# Altium PCB loraplate.PcbDoc
Units mm, origin at the board's own origin, x right, y up, seen from the top; angles counter-clockwise.
Board outline 79 x 36 mm, 2 copper layers (Top Layer, Bottom Layer); 43 components, 41 nets, 162 pads, 95 vias.
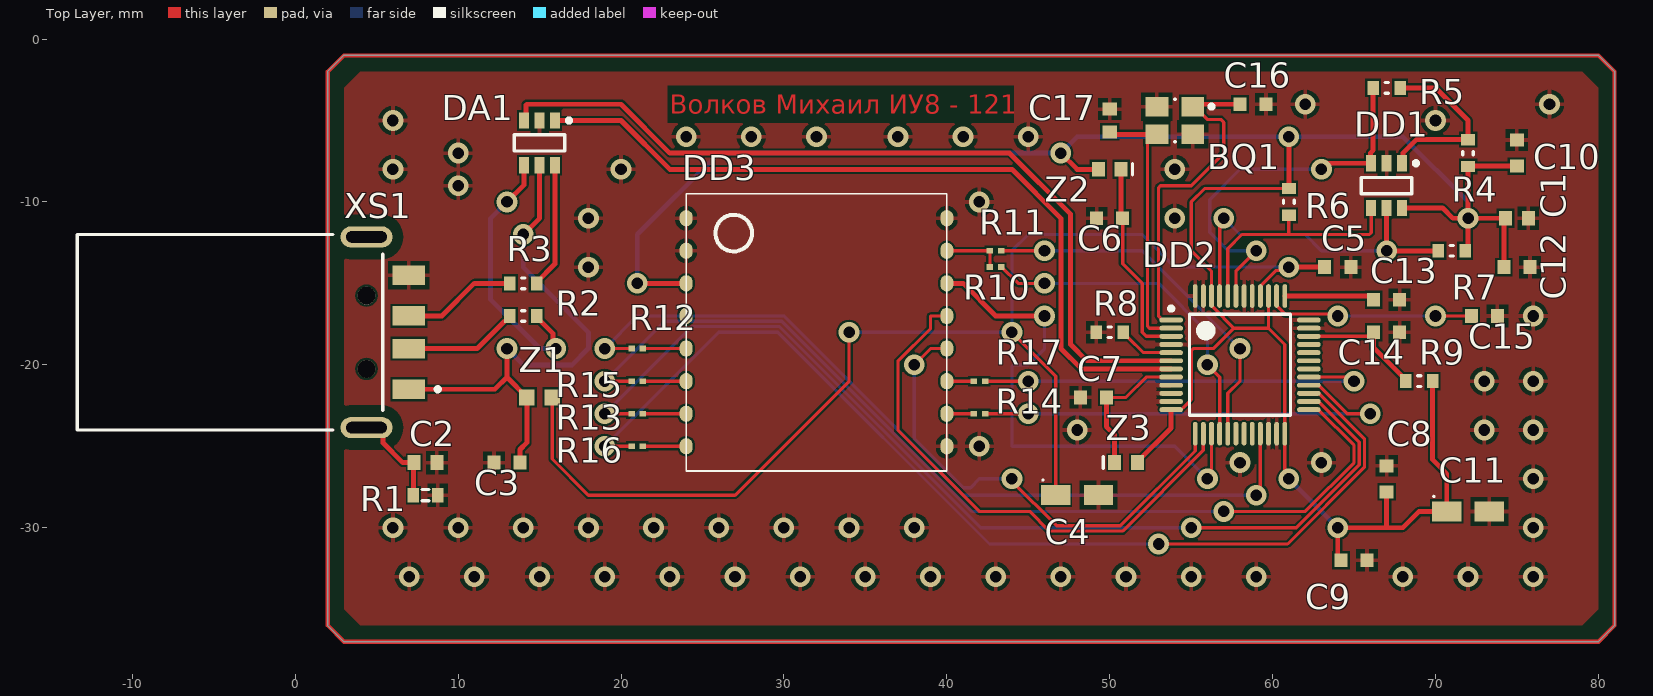
[diagram p0: Top Layer view]
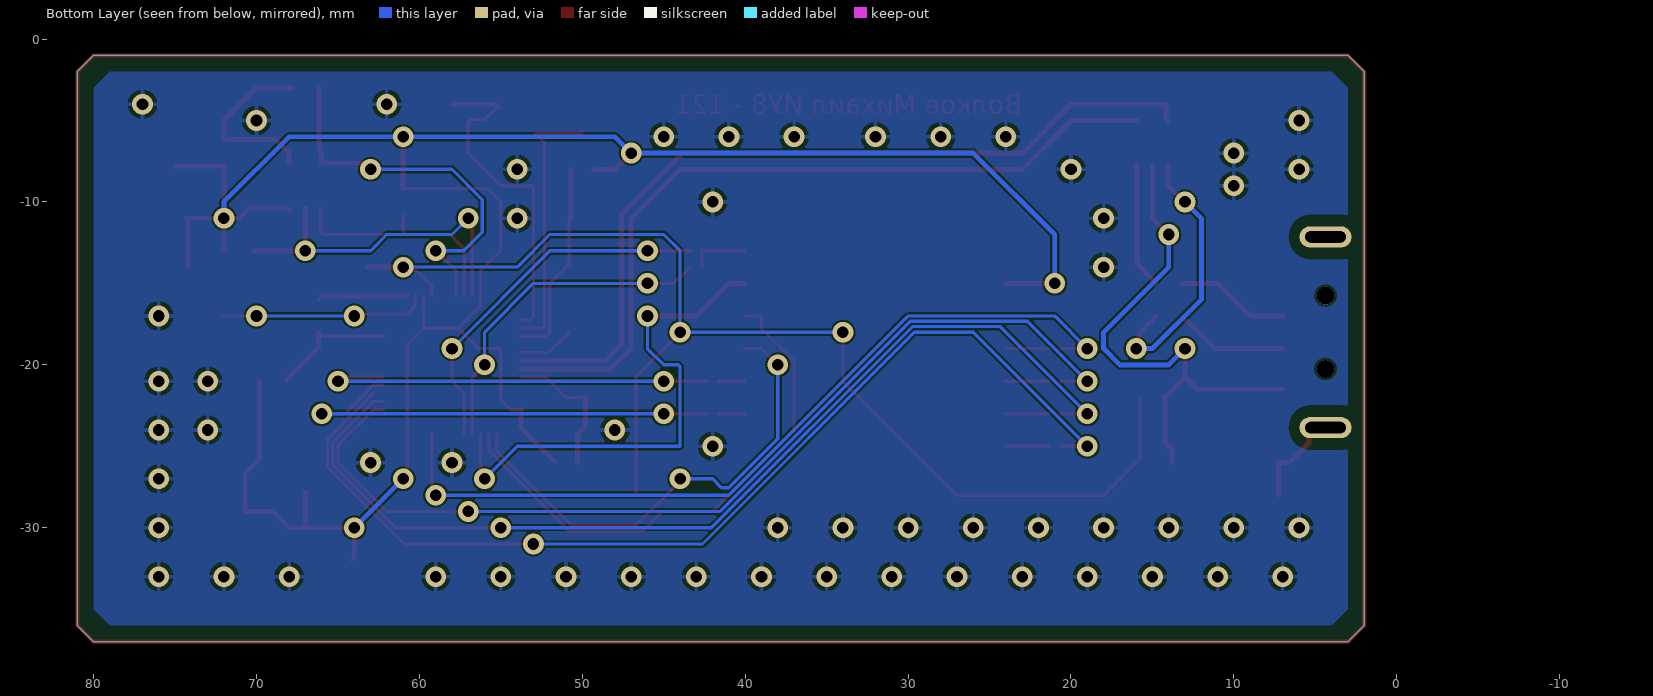
[diagram p1: Bottom Layer view, seen from below]
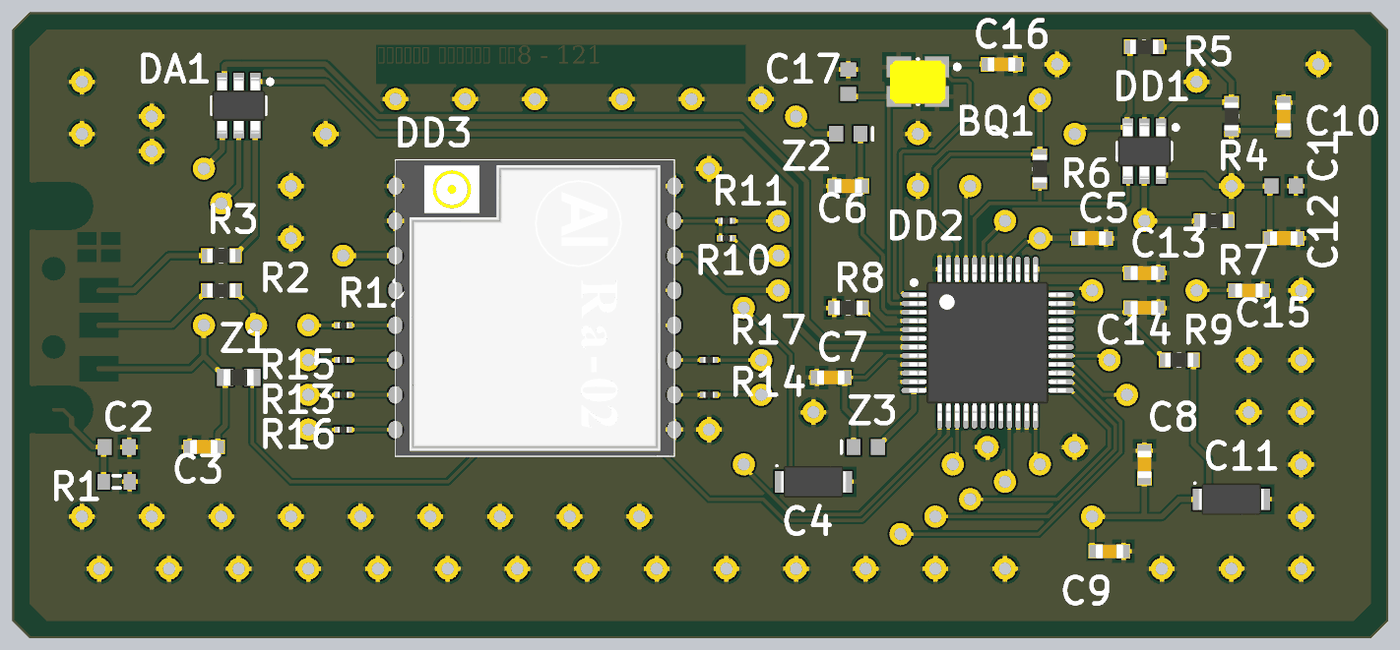
[diagram p2: 3D render of the assembled board from above, using the file's embedded part models]

## Layer stack, top to bottom
Top Solder: solder mask 0.0102, Solder Resist, Dk 3.5
Top Layer: signal copper 0.0356
Dielectric 1: dielectric 0.32, FR-4, Dk 4.8
Bottom Layer: signal copper 0.0356
Bottom Solder: solder mask 0.0102, Solder Resist, Dk 3.5

## Board outline
2,-36 2,-2 3,-1 80,-1 81,-2 81,-36 80,-37 3,-37

## Design rules (kind name [scope] priority, off if disabled: settings)
Clearance [All] p1: gap=0.125 ignorepadtopadclearanceinfootprint=FALSE
DiffPairsRouting [All] p1: maxlimit=0.3 minlimit=0.125 mostfreqgap=0.3 toplayer_minwidth=0.125 toplayer_maxwidth=0.3 toplayer_prefwidth=0.3 bottomlayer_minwidth=0.125 bottomlayer_maxwidth=0.3 bottomlayer_prefwidth=0.3 maxuncoupledlength=12.7
PolygonConnect [All] p1: connectstyle=Relief reliefconductorwidth=0.254 reliefentries=4 polygonreliefangle="90 Angle" airgapwidth=0.254
RoutingCorners [All] p1: cornerstyle=45-Degree minsetback=2.5 maxsetback=2.5
RoutingVias [All] p1: holewidth=0.3 width=0.6 viastyle="Through Hole" minholewidth=0.3 minwidth=0.6 maxholewidth=0.3 maxwidth=0.6
SolderMaskExpansion [All] p1: expansion=0.102
Width [All] p1: maxlimit=0.3 minlimit=0.125 preferedwidth=0.2
28 further rules are at their usual default settings.

## Classes and differential pairs
differential pair USB: +USB_P -USB_N
differential pair USB1: +USB1_P -USB1_N

## Components (designator, comment, footprint, x,y, rotation, side; value= is the part's Value field where it differs from the comment)
BQ1 "ABM8G-12.000MHZ-4Y-T3" Abracon_ABM8G_0 54,-5 r180 top
C1 "*" 1608[0603] 75,-11 r180 top value=100n
C2 "*" 1608[0603] 8,-26 r180 top value=4.7n
C3 "*" CAPC1608X09L 13,-26 r0 top value=10n
C4 "*" CAPMP3216X16N-A 48,-28 r0 top value=4.7uF
C5 "*" CAPC1608X09L 64,-14 r180 top value=100n
C6 "*" CAPC1608X09L 50,-11 r0 top value=100n
C7 "*" CAPC1608X09L 49,-22 r0 top value=100n
C8 "*" CAPC1608X09L 67,-27 r270 top value=100n
C9 "*" CAPC1608X09L 65,-32 r180 top value=100n
C10 "*" CAPC1608X09L 75,-7 r270 top value=100n
C11 "*" CAPMP3216X16N-A 72,-29 r0 top value=4.7uF
C12 "*" CAPC1608X09L 75,-14 r180 top value=100n
C13 "*" CAPC1608X09L 67,-16 r180 top value=100n
C14 "*" CAPC1608X09L 67,-18 r0 top value=10n
C15 "*" CAPC1608X09L 73,-17 r180 top value=100n
C16 "*" CAPC1608X09L 58.8,-4 r180 top value=10
C17 "*" 1608[0603] 50,-5 r270 top value=10
DA1 "USBLC6-2SC6" SOT95P280X145-6N 15,-6.375 r270 top
DD1 "93LC56BT-I/OT" SOT95P280X145-6N 67,-9 r270 top
DD2 "FT232HL-REEL" TSQFP50P900X900X160-48N 58,-20 r0 top
DD3 "RA-02 SX1278" RA-02 24,-9.5 r0 top
R1 "R1608" J1-0603 8,-28 r0 top value=1M
R2 "R1608" RESC1608X05N 14,-17 r180 top value=22
R3 "R1608" RESC1608X05N 14,-15 r180 top value=22
R4 "R1608" RESC1608X05N 72,-7 r270 top value=10k
R5 "R1608" RESC1608X05N 67,-3 r0 top value=2k
R6 "R1608" RESC1608X05N 61,-10 r90 top value=10k
R7 "R1608" RESC1608X05N 71,-13 r0 top value=10k
R8 "R1608" RESC1608X05N 50,-18 r180 top
R9 "R1608" RESC1608X05N 69,-21 r180 top value=10k
R10 "R0603" RESC0603X02N 43,-14 r180 top value=0
R11 "R0603" RESC0603X02N 43,-13 r180 top value=0
R12 "R0603" RESC0603X02N 21,-19 r0 top value=0
R13 "R0603" RESC0603X02N 21,-23 r0 top value=0
R14 "R0603" RESC0603X02N 42,-23 r180 top value=0
R15 "R0603" RESC0603X02N 21,-21 r0 top value=0
R16 "R0603" RESC0603X02N 21,-25 r0 top value=0
R17 "R0603" RESC0603X02N 42,-21 r180 top value=0
XS1 "Conn_Molex_0480372200_eec" Molex_0480372200_0 -4,-18 r270 top
Z1 "BLM18AG601SN1D" INDC1608X08N_BLM18AG 15,-22 r0 top
Z2 "BLM18AG601SN1D" INDC1608L 50,-8 r180 top
Z3 "BLM18AG601SN1D" INDC1608L 51,-26 r0 top

## Footprints (in the part's own frame and the unit in brackets; to place one, negate y for a bottom-side part, rotate by r counter-clockwise, add the part's x,y. Pads: shape width x height; smd on the part's side, far side on the other; paste and mask are expansions set on the pad)
1608[0603] [mm] "Chip Capacitor, Body 1.6x0.8mm, IPC High Density"
  rect 0.8x0.9 smd: 1(-0.7,0) 2(0.7,0)
  body extent -0.87,-0.48 0.87,0.48, height 1.3
Abracon_ABM8G_0 [mm]
  rect 1.4x1.2 smd paste+0 mask+0: 1(-1.1,-0.85) 2(1.1,-0.85) 3(1.1,0.85) 4(-1.1,0.85)
  silkscreen extent -2.38,-1.3 0.02,1.3, body extent -1.9,-1.55 1.9,1.55, height 0.25
CAPC1608X09L [mm] "Chip Capacitor, 2-Leads, Body 1.60x0.80mm, IPC High Density"
  rect 0.8x0.85 smd paste-0.05 mask+0.07: 1(-0.8,0) 2(0.8,0)
  body extent -0.8,-0.4 0.8,0.4, height 0.9
CAPMP3216X16N-A [mm] "Molded Capacitor, 2-Leads, Body 3.20x1.60mm, IPC Medium Density"
  rect 1.8x1.23 smd: 1(-1.31,0) 2(1.31,0)
  silkscreen extent -2.15,0.88 -2.05,0.97, body extent -1.92,-0.9 1.92,0.9, height 1.6
INDC1608L [mm] "Chip Inductor, Body 1.6x0.8mm, IPC High Density"
  rect 0.8x0.9 smd: 1(-0.7,0) 2(0.7,0)
  silkscreen extent -1.4,-0.35 -1.4,0.35, body extent -0.87,-0.48 0.87,0.48, height 0.55
INDC1608X08N_BLM18AG [mm] "Chip Inductor, 2-Leads, Body 1,60x0,80mm, IPC Medium Density"
  rect 0.94x0.98 smd: 1(-0.78,0) 2(0.78,0)
  body extent -0.87,-0.48 0.87,0.48, height 0.8
J1-0603 [mm] "Chip Resistor, Body 1.6x0.8mm, IPC High Density"
  rect 0.7x0.9 smd: 1(-0.75,0) 2(0.75,0)
  silkscreen extent -0.2,-0.35 0.2,0.35, body extent -0.85,-0.48 0.85,0.48, height 0.9
Molex_0480372200_0 [mm]
  rect 1.2x2 smd paste+0 mask+0: 1(3.5,10.975) 2(1,10.975) 3(-1,10.975) 4(-3.5,10.975)
  oval 1.3x3.2 hole 2.5 slot 0.7 at 0 deg paste-1000 mask+0: 5(-5.85,8.375) 6(5.85,8.375)
  round 1.1 hole 1.1 unplated paste-1000 mask+0: ""(-2.25,8.375) ""(2.25,8.375)
  silkscreen extent -6,-9.38 6,12.88, body extent -6.6,-9.6 6.6,12.07, height 0.25
RA-02 [mm]
  oval 0.8x1 smd: 1(0,-1.5) 2(0,-3.5) 3(0,-5.5) 4(0,-7.493) 5(0,-9.5) 6(0,-11.5) 7(0,-13.5) 8(0,-15.5) 9(16,-15.5) 10(16,-13.5) 11(16,-11.5) 12(16,-9.5) 13(16,-7.5) 14(16,-5.5) 15(16,-3.5) 16(16,-1.5)
  silkscreen extent 0,-17.02 16,0, body extent 0,-17.01 16,-0.01, height 3.2
RESC0603X02N [mm] "Chip Resistor, 2-Leads, Body 0.60x0.30mm, IPC Medium Density"
  rect 0.4x0.35 smd paste-1: 1(-0.35,0) 2(0.35,0)
  body extent -0.32,-0.17 0.32,0.17, height 0.23
RESC1608X05N [mm] "Chip Resistor, 2-Leads, Body 1.60x0.80mm, IPC Medium Density"
  rect 0.7x0.85 smd paste-0.05: 1(-0.825,0) 2(0.825,0)
  silkscreen extent -0.1,-0.33 0.1,0.33, body extent -0.8,-0.4 0.8,0.4, height 0.45
SOT95P280X145-6N [mm] "SOT23, 6-Leads, Body 2.92x2.80mm, Pitch 0.95mm, IPC Medium Density"
  rect 1x0.6 smd: 1(-1.375,0.95) 2(-1.375,0) 3(-1.375,-0.95) 4(1.375,-0.95) 5(1.375,0) 6(1.375,0.95)
  silkscreen extent -1.5,-1.55 0.5,1.93, body extent -1.6,-1.53 1.6,1.53, height 1.45
TSQFP50P900X900X160-48N [mm] "TSQFP, 48-Leads, Body 7,00x7,00mm, Pitch 0,50mm, IPC Medium Density"
  oval 1.45x0.3 smd mask+0.07: 1(-4.225,2.75) 2(-4.225,2.25) 3(-4.225,1.75) 4(-4.225,1.25) 5(-4.225,0.75) 6(-4.225,0.25) 7(-4.225,-0.25) 8(-4.225,-0.75) 9(-4.225,-1.25) 10(-4.225,-1.75) 11(-4.225,-2.25) 12(-4.225,-2.75) 25(4.225,-2.75) 26(4.225,-2.25) 27(4.225,-1.75) 28(4.225,-1.25) 29(4.225,-0.75) 30(4.225,-0.25) 31(4.225,0.25) 32(4.225,0.75) 33(4.225,1.25) 34(4.225,1.75) 35(4.225,2.25) 36(4.225,2.75)
  oval 0.3x1.45 smd mask+0.07: 13(-2.75,-4.225) 14(-2.25,-4.225) 15(-1.75,-4.225) 16(-1.25,-4.225) 17(-0.75,-4.225) 18(-0.25,-4.225) 19(0.25,-4.225) 20(0.75,-4.225) 21(1.25,-4.225) 22(1.75,-4.225) 23(2.25,-4.225) 24(2.75,-4.225) 37(2.75,4.225) 38(2.25,4.225) 39(1.75,4.225) 40(1.25,4.225) 41(0.75,4.225) 42(0.25,4.225) 43(-0.25,4.225) 44(-0.75,4.225) 45(-1.25,4.225) 46(-1.75,4.225) 47(-2.25,4.225) 48(-2.75,4.225)
  silkscreen extent -4.35,-3.1 3.1,3.57, body extent -4.5,-4.5 4.5,4.5, height 1.6

## Part data
C1 C2 C3 C5 C6 C7 C8 C9 C10 C12 C13 C14 C15 C16 C17: library part CC1608, "Конденсатор 1.6x0.8 мм", Tolerance=±10%, ТКЕ=X7R
  C1 C5 C6 C7 C8 C9 C10 C12 C13 C15: РКД Наименование="CC1608M - NP0 - 16 V - 100 nF ±10%"
  C2: РКД Наименование="CC1608M - NP0 - 16 V - 4.7 nF ±10%"
  C3 C14: РКД Наименование="CC1608M - NP0 - 16 V - 10 nF ±10%"
  C16 C17: РКД Наименование="CC1608M - NP0 - 16 V - 10 pF ±10%"
C4 C11: library part CT3216-A, "Tantalum Surface Mount Capacitor, Size A", Voltage=16, РКД Наименование="CT3216M - xx V - 4.7 uF ±10%"
DA1: "USB protection IC", Breakdown Voltage=6V, Capacitance=3.5pF, Case/Package=SOT-23, Clamping Voltage=17V, Leakage Current=150nA, Manufacturer=STMicroelectronics, Max Operating Temperature=125°C, Min Operating Temperature=-40°C, Operating Supply Voltage=1.1V, Package Quantity=3000, Peak Pulse Current=5A, Power Line Protection=Yes, Reverse Standoff Voltage=5.25V, Supplier Part Number 1=497-5235-1-ND, Test Current=1mA, Working Voltage=5V, ComponentLink1Description=http://www.farnell.com/datasheets/1690354.pdf, ComponentLink1URL=http://www.farnell.com/datasheets/1690354.pdf, ComponentLink2Description=http://www.st.com/content/ccc/resource/technical/document/datasheet/06/1d/48/9c/6c/20/4a/b2/CD00050750.pdf/files/CD00050750.pdf/jcr:content/translations/en.CD00050750.pdf, ComponentLink2URL=http://www.st.com/content/ccc/resource/technical/document/datasheet/06/1d/48/9c/6c/20/4a/b2/CD00050750.pdf/files/CD00050750.pdf/jcr:content/translations/en.CD00050750.pdf, ComponentLink3Description=http://www.st.com/web/en/resource/technical/document/datasheet/CD00050750.pdf, ComponentLink3URL=http://www.st.com/web/en/resource/technical/document/datasheet/CD00050750.pdf, ComponentLink4Description=http://datasheet.iiic.cc/stmicroelectronics/USBLC6-2SC6.pdf, ComponentLink4URL=http://datasheet.iiic.cc/stmicroelectronics/USBLC6-2SC6.pdf, ComponentLink5Description=http://www.produktinfo.conrad.com/datenblaetter/1100000-1199999/001184109-da-01-en-IC_ESD_PROTECTI_USBLC6_2SC6_SOT_23_6_STM.pdf, ComponentLink5URL=http://www.produktinfo.conrad.com/datenblaetter/1100000-1199999/001184109-da-01-en-IC_ESD_PROTECTI_USBLC6_2SC6_SOT_23_6_STM.pdf, Contact Plating=Matte,Tin, Data Rate=480Mbps, Depth=1.75mm, Direction=Bidirectional,Unidirectional, Element Configuration=Dual, ESD Protection=Yes, Height=1.3mm, Lead Free="Lead Free", Length=3.05mm, Manufacturer Part Number=USBLC6-2SC6, Max Breakdown Voltage=6V, Max Reverse Leakage Current=150nA, Min Breakdown Voltage=6V, Mount="Surface Mount", Number of Bidirectional Channels=2, Number of Channels=2, Number of Elements=1, Number of Pins=6, Packaging="Tape and Reel", PartNo=USBLC6-2SC6, Polarity=Bidirectional,Unidirectional, Pricing 1="1=0.49, 10=0.419, 100=0.3131, 500=0.24602, 1000=0.1901 (USD)", Radiation Hardening=No, REACH SVHC="No SVHC", Reverse Breakdown Voltage=6V, Stock 1=165611, Supplier 1=Digi-Key, Termination=SMD/SMT, Width=1.75mm
DD1: "IC EEPROM 2K SPI 2MHZ SOT23-6", Case/Package=SOT-23, Frequency=2MHz, Manufacturer=Microchip, Max Operating Temperature=85°C, Max Supply Voltage=5.5V, Min Operating Temperature=-40°C, Min Supply Voltage=2.5V, Nominal Supply Current=2mA, Package Quantity=3000, Supplier Part Number 1=93LC56BT-I/OTCT-ND, Access Time=250ns, ComponentLink1Description=http://ww1.microchip.com/downloads/jp/DeviceDoc/jp013939.pdf, ComponentLink1URL=http://ww1.microchip.com/downloads/jp/DeviceDoc/jp013939.pdf, ComponentLink2Description=http://www.microchip.com/mymicrochip/filehandler.aspx?ddocname=en013939, ComponentLink2URL=http://www.microchip.com/mymicrochip/filehandler.aspx?ddocname=en013939, Contact Plating=Matte,Tin, Density=2Kb, Height=1.3mm, Interface=Serial, Lead Free="Lead Free", Length=3.1mm, Manufacturer Part Number=93LC56BT-I/OT, Max Frequency=2MHz, Memory Size=2Kb, Memory Type=EEPROM, Mount="Surface Mount", Number of Pins=6, Packaging="Tape and Reel", Pricing 1="1=0.23, 25=0.2164, 100=0.2119 (USD)", Radiation Hardening=No, REACH SVHC="No SVHC", Stock 1=30936, Supplier 1=Digi-Key, Width=1.8mm
DD2: "IC HS USB TO UART/FIFO 48LQFP", Case/Package=LQFP, Manufacturer=FTDI, Max Operating Temperature=85°C, Max Supply Voltage=3.63V, Min Operating Temperature=-40°C, Min Supply Voltage=2.97V, Nominal Supply Current=60mA, Operating Supply Current=24mA, Operating Supply Voltage=3.3V, Package Quantity=1, Supplier Part Number 1=768-1101-1-ND, ComponentLink1Description=http://www.ftdichip.com/Support/Documents/DataSheets/ICs/DS_FT232H.pdf, ComponentLink1URL=http://www.ftdichip.com/Support/Documents/DataSheets/ICs/DS_FT232H.pdf, ComponentLink2Description=http://www.farnell.com/datasheets/1913746.pdf, ComponentLink2URL=http://www.farnell.com/datasheets/1913746.pdf, ComponentLink3Description=http://www.mouser.com/ds/2/163/DS_FT232H-11324.pdf, ComponentLink3URL=http://www.mouser.com/ds/2/163/DS_FT232H-11324.pdf, Data Rate=12Mbps, Height=1.4mm, Interface=RS-232,RS-422,RS-485,UART, Lead Free="Lead Free", Length=7mm, Manufacturer Part Number=FT232HL-REEL, Mount="Surface Mount", Number of Channels=1, Number of Pins=48, Packaging="Tape and Reel", Pricing 1="1=4.25, 10=3.55, 100=3.1, 250=2.95, 500=2.85002 (USD)", REACH SVHC="No SVHC", Stock 1=26419, Supplier 1=Digi-Key, Weight=0.006409oz, Width=7mm
DD3: library part RA-02
R1: "Резистор 1.6x0.8 мм", Manufacturer Part Number=RC0603JR-071ML, Supplier Part Number 1=311-1.0MGRCT-ND, Tolerance=±5%, РКД Наименование="RC1608M - 1 MOhm ±5%"
R2 R3: "Резистор 1.6x0.8 мм", Tolerance=±1%, РКД Наименование="RC1608M - 22 Ohm ±1%"
R4 R5 R6 R7 R8 R9: "Резистор 1.6x0.8 мм", Tolerance=±5%
  R4 R6 R7 R9: РКД Наименование="RC1608M - 10 kOhm ±5%"
  R5: РКД Наименование="RC1608M - 2 kOhm ±5%"
  R8: РКД Наименование="RC1608M - 100 Ohm ±5%"
R10 R11 R12 R13 R14 R15 R16 R17: "Резистор 0.6x0.3 мм"
XS1: "CONN PLUG USB A 4POS SMD R/A", Current - Maximum per Contact=1.5A, Digikey Part Number=WM3983CT-ND, Manufacturer=Molex, Mouser Part Number=538-48037-2200, Package=CONN_USB_12MM0_18MM75, Part Number=0480372200, Temperature="-20°C to +85°C", Temperature Range High=+85°C, Temperature Range Low=-20°C, Voltage - Maximum="150V AC (RMS)", ComponentLink1Description=Upverter, ComponentLink1URL=https://upverter.com/upn/revision/6bade1e906f93a88/, ComponentLink2Description=Datasheet, ComponentLink2URL=http://www.molex.com/pdm_docs/sd/480372200_sd.pdf, Digikey Description="CONN PLUG USB A 4POS SMD R/A", helpURL=https://upverter.com/upn/revision/6bade1e906f93a88/, Is Female=yes, Lead Free=yes, Price=0.972849437621, RoHS=TRUE, Supplier 1=Digi-Key, Supplier 2=Mouser, Supplier Part Number 1=WM3983CT-ND, Supplier Part Number 2=538-48037-2200
Z1 Z2 Z3: "FERRITE CHIP 600 OHM 500MA 0603", Case/Package=0603, Case Code (Metric)=1608, Current Rating=500mA, DC Resistance (DCR)=380mR, Frequency=100MHz, Manufacturer=Murata, Max Operating Temperature=125°C, Min Operating Temperature=-55°C, Package Quantity=1, Supplier Part Number 1=490-1014-1-ND, Tolerance=25%, Case Code (Imperial)=0603, ComponentLink1Description=https://www.murata.com/en-us/products/productdata/8796738650142/ENFA0003.pdf, ComponentLink1URL=https://www.murata.com/en-us/products/productdata/8796738650142/ENFA0003.pdf, ComponentLink2Description=http://www.farnell.com/datasheets/1756147.pdf, ComponentLink2URL=http://www.farnell.com/datasheets/1756147.pdf, ComponentLink3Description=http://www.jameco.com/Jameco/Products/ProdDS/1844766.pdf, ComponentLink3URL=http://www.jameco.com/Jameco/Products/ProdDS/1844766.pdf, ComponentLink4Description=http://search.murata.co.jp/Ceramy/image/img/PDF/ENG/L0110S0100BLM18A.pdf, ComponentLink4URL=http://search.murata.co.jp/Ceramy/image/img/PDF/ENG/L0110S0100BLM18A.pdf, ComponentLink5Description=http://www.produktinfo.conrad.com/datenblaetter/425000-449999/442309-da-01-en-CHIP_DROSSEL_0603_600R_500MA_1_6X0_8MM.pdf, ComponentLink5URL=http://www.produktinfo.conrad.com/datenblaetter/425000-449999/442309-da-01-en-CHIP_DROSSEL_0603_600R_500MA_1_6X0_8MM.pdf, ComponentLink6Description=http://www.produktinfo.conrad.com/datenblaetter/1100000-1199999/001172228-da-01-en-DROSSEL_0603_600R_1_6X0_8MM_4000ST.pdf, ComponentLink6URL=http://www.produktinfo.conrad.com/datenblaetter/1100000-1199999/001172228-da-01-en-DROSSEL_0603_600R_1_6X0_8MM_4000ST.pdf, Core Material=Ferrite, DC Current=500mA, Depth=0.8mm, Height=0.8mm, Impedance=600R, Lead Free="Lead Free", Length=1.6mm, Manufacturer Part Number=BLM18AG601SN1D, Material=Ferrite,Steel, Max Current Rating=500mA, Max DC Current=500mA, Military Standard=Not, Number of Circuits=1, Number of Lines=1, Number of Pins=2, Packaging="Tape and Reel", Pricing 1="1=0.1, 10=0.079, 25=0.072, 50=0.0648, 100=0.0476, 250=0.0346, 500=0.0317, 1000=0.02738 (USD)", Radiation Hardening=No, REACH SVHC="No SVHC", Shielding=Unshielded, Stock 1=1068043, Supplier 1=Digi-Key, Termination=SMD/SMT, Test Frequency=100MHz, Weight=7.1E-05oz, Width=0.8mm

## Via types
v1: diameter 1.27, hole 0.711, Top Layer to Bottom Layer, 95 vias

## Nets (pads, with @x,y where several pads share a name; then routed paths per layer and width w, separated by ;. In a path a pad name is that pad's centre, name@x,y a point inside that pad or via, vN(x,y) a via of type N, cw(c..) or ccw(c..) an arc to the next point about the centre after c; other vN are vias at no path point)
CS: DD2.16 R10.1 | length 20.8
  Top Layer w0.2: R10.1 43.375,-14 44.375,-15 v1(46,-15) ; v1(56,-20) 56.75,-20.75 DD2.16
  Bottom Layer w0.2: v1(46,-15) 53,-15 56,-18 v1(56,-20)
CS/P: DD2.17 R11.1 | length 22.7
  Top Layer w0.2: R11.1 v1(46,-13) ; DD2.17 57.25,-21.75 58,-21 v1(58,-19)
  Bottom Layer w0.2: v1(46,-13) 52,-13 v1(58,-19)
DI: DD2.15 DD3.14 | length 31.9
  Top Layer w0.2: v1(56,-27) 56,-26.71 56.25,-26.46 DD2.15
  Top Layer w0.3: DD3.14 41,-15 43,-17 v1(46,-17)
  Bottom Layer w0.2: v1(46,-17) 46,-19 45,-20 44.117,-20 44,-20.117 44,-25 54,-25 v1(56,-27)
DO: DD2.14 DD3.13 | length 33.2
  Top Layer w0.2: DD3.13 39,-17 39,-17.784 37,-19.784 37,-24 42,-29 45.094,-29 46.301,-30.208 50.792,-30.208 55.75,-25.25 DD2.14
EECLK: DD1.4 DD2.44 R6.1 | length 14.8
  Top Layer w0.2: DD2.44 57.25,-12.867 58.117,-12 61,-12 ; R6.1 61,-12 ; DD1.4 66.05,-11.883 65.933,-12 61,-12
EECS: DD1.5 DD2.45 R7.1 | length 21.5
  Top Layer w0.2: DD2.45 56.75,-11.54 57,-11.29 v1(57,-11)
  Top Layer w0.3: DD1.5 v1(67,-13) R7.1
  Bottom Layer w0.2: v1(57,-11) 58,-12 62,-12 63,-13 v1(67,-13)
EEDATA: DD1.3 DD2.43 R5.1 | length 24.2
  Top Layer w0.2: DD2.43 57.75,-14.25 v1(59,-13) ; v1(63,-8) v1@63.375,-7.625 ; DD1.3@66,-7.575 DD1.3
  Top Layer w0.3: v1@63.375,-7.625 DD1.3 ; DD1.3@66,-7.575 66,-7 66.175,-6.825 R5.1
  Bottom Layer w0.2: v1(59,-13) 57.283,-13 56.14,-11.857 56.14,-9.86 58,-8 v1(63,-8)
GND: BQ1.2 BQ1.4 C1.1 C2.1 C3.1 C4.2 C5.1 C6.1 C7.1 C8.1 C9.1 C10.1 C11.2 C12.1 C13.1 C14.2 C15.1 C16.1 C17.1 DA1.2 DD1.2 DD2.4 DD2.9 DD2.10 DD2.11 DD2.22 DD2.23 DD2.35 DD2.36 DD2.41 DD2.42 DD2.47 DD2.48 DD3.1 DD3.2 DD3.9 DD3.16 R1.2 R8.2 XS1.4
  other v1: 7,-33 11,-33 15,-33 19,-33 23,-33 27,-33 31,-33 35,-33 39,-33 43,-33 47,-33 51,-33 55,-33 59,-33 68,-33 72,-33 76,-33 6,-30 10,-30 14,-30 18,-30 22,-30 26,-30 30,-30 34,-30 38,-30 76,-30 76,-27 58,-26 63,-26 42,-25 48,-24 73,-24 76,-24 73,-21 76,-21 76,-17 18,-14 18,-11 54,-11 42,-10 10,-9 6,-8 20,-8 54,-8 10,-7 24,-6 28,-6 32,-6 37,-6 41,-6 45,-6 6,-5 70,-5 62,-4 77,-4
NetBQ1_1: BQ1.1 C16.2 DD2.1 | length 20.7
  Top Layer w0.2: DD2.1 53.227,-17.25 53,-17.023 53,-9.117 53.117,-9 55,-9 57,-7 57,-5.117 56.816,-4.933 55.983,-4.933 55.2,-4.15 BQ1.1
  Top Layer w0.3: BQ1.1@55.2,-4.15 55.35,-4 C16.2
NetBQ1_3: BQ1.3 C17.2 DD2.2 | length 16.4
  Top Layer w0.2: C17.2 C17.2@50.15,-5.85 ; BQ1.3@52.825,-5.85 52.325,-6.35 52.325,-17.633 52.442,-17.75 DD2.2
  Top Layer w0.3: C17.2@50.15,-5.85 BQ1.3@52.825,-5.85
NetC2_2: C2.2 R1.1 XS1.6 | length 6.2
  Top Layer w0.2: XS1.6 4.892,-23.85 XS1.6@5.4,-24.358 ; C2.2@7.25,-26.05 C2.2@7.25,-26 ; C2.2@7.25,-25.9 C2.2@7.25,-26 ; C2.2 C2.2@7.25,-26
  Top Layer w0.3: XS1.6@5.4,-24.358 5.4,-24.8 6.6,-26 C2.2@7.25,-26 ; R1.1 C2.2@7.25,-26.05
NetC13_2: C13.2 DD2.37 | length 5.5
  Top Layer w0.2: C13.2@65.975,-15.775 C13.2
  Top Layer w0.3: DD2.37 C13.2@65.975,-15.775
NetC14_1: C14.1 DD2.34 R9.2 | length 7.9
  Top Layer w0.2: DD2.34 65.95,-18.25 C14.1 ; R9.2 R9.2@68.175,-20.925
  Top Layer w0.3: C14.1 66.2,-18.95 R9.2@68.175,-20.925
NetC15_2: C15.2 DD2.38 | length 12.8
  Top Layer w0.2: DD2.38 60.25,-16.377 60.375,-16.502 60.375,-16.505 60.745,-16.875 63.875,-16.875 v1(64,-17) ; v1(70,-17) C15.2
  Bottom Layer w0.2: v1(64,-17) v1(70,-17)
NetDD1_1: DD1.1 R4.1 R5.2 | length 11.2
  Top Layer w0.2: DD1.1 DD1.1@68,-7.575
  Top Layer w0.3: R5.2 70,-3 72,-5 R4.1 68.825,-6.175 68,-7 DD1.1@68,-7.575
NetDD2_5: DD2.5 R8.1 | length 3.5
  Top Layer w0.2: R8.1 50.825,-18.075 51.075,-18.325 51.15,-18.325 52.075,-19.25 DD2.5
NetDD2_21: DD2.21 R12.1 | length 50.9
  Top Layer w0.2: v1(19,-19) R12.1 ; v1(59,-28) 59,-27.71 59.25,-27.46 DD2.21
  Bottom Layer w0.2: v1(19,-19) 21,-17 30,-17 41,-28 v1(59,-28)
NetDD2_25: DD2.25 R15.1 | length 60
  Top Layer w0.2: v1(19,-21) R15.1 ; v1(57,-29) 62,-29 65,-26 65,-24.95 62.8,-22.75 DD2.25
  Bottom Layer w0.2: v1(19,-21) 22.675,-17.325 29.865,-17.325 41.54,-29 v1(57,-29)
NetDD2_26: DD2.26 R13.1 | length 62.4
  Top Layer w0.2: v1(19,-23) R13.1 ; v1(55,-30) 61.46,-30 65.325,-26.135 65.325,-24.745 62.955,-22.375 62.952,-22.375 62.827,-22.25 DD2.26
  Bottom Layer w0.2: v1(19,-23) 24.35,-17.65 29.731,-17.65 42.081,-30 v1(55,-30)
NetDD2_27: DD2.27 R16.1 | length 64.2
  Top Layer w0.2: v1(19,-25) R16.1 ; v1(53,-31) 60.919,-31 65.65,-26.269 65.65,-24.57 62.867,-21.787 62.864,-21.787 DD2.27@62.827,-21.75
  Bottom Layer w0.2: v1(19,-25) 26,-18 29.621,-18 42.621,-31 v1(53,-31)
NetDD2_28: DD2.28 R14.1 | length 28.1
  Top Layer w0.2: R14.1 v1(45,-23) ; DD2.28 62.827,-21.25 62.952,-21.375 62.955,-21.375 64.58,-23 v1(66,-23)
  Bottom Layer w0.2: v1(45,-23) v1(66,-23)
NetDD2_29: DD2.29 R17.1 | length 25.5
  Top Layer w0.2: R17.1 v1(45,-21) ; DD2.29 64.46,-20.75 64.71,-21 v1(65,-21)
  Bottom Layer w0.2: v1(45,-21) v1(65,-21)
NetDD3_5: DD3.5 R12.2 | length 2.6
  Top Layer w0.2: R12.2 DD3.5
NetDD3_6: DD3.6 R15.2 | length 2.7
  Top Layer w0.2: R15.2 DD3.6
NetDD3_7: DD3.7 R13.2 | length 2.7
  Top Layer w0.2: R13.2 DD3.7
NetDD3_8: DD3.8 R16.2 | length 2.7
  Top Layer w0.2: R16.2 DD3.8
NetDD3_10: DD3.10 R14.2 | length 1.7
  Top Layer w0.2: DD3.10 R14.2
NetDD3_11: DD3.11 R17.2 | length 1.7
  Top Layer w0.2: DD3.11 R17.2
NetDD3_15: DD3.15 R10.2 R11.2 | length 3.7
  Top Layer w0.2: DD3.15 R11.2 R10.2
NetR2_2: R2.2 XS1.2 | length 7.1
  Top Layer w0.2: R2.2@12.85,-17.325 12.925,-17.325 13.175,-17.075 R2.2
  Top Layer w0.3: XS1.2 11.175,-19 R2.2@12.85,-17.325
NetR3_2: R3.2 XS1.3 | length 7
  Top Layer w0.3: XS1.3 9,-17 11,-15 R3.2
SK: DD2.13 DD3.12 | length 29.9
  Top Layer w0.2: v1(38,-20) 39,-19 DD3.12 ; v1(44,-27) 44,-27.143 46.74,-29.883 50.658,-29.883 55.25,-25.29 DD2.13
  Bottom Layer w0.2: v1(38,-20) 38,-24.54 41,-27.54 41.46,-27.54 42,-27 v1(44,-27)
USB1_N: DA1.4 R2.1 | length 16.8
  Top Layer w0.3: v1(13,-10) 14.05,-8.95 DA1.4 ; R2.1 14.825,-17.075 15.814,-18.064 15.814,-18.814 v1(16,-19)
  Bottom Layer w0.3: v1(13,-10) 12,-11 12,-16 15,-19 v1(16,-19)
USB1_P: DA1.6 R3.1 | length 7.7
  Top Layer w0.3: R3.1 14.825,-14.925 15.95,-13.8 DA1.6
USB_N: DA1.3 DD2.6 | length 51.8
  Top Layer w0.3: DA1.3 14.176,-4.874 14.176,-4.05 14.226,-4 20,-4 23,-7 43.849,-7 47.6,-10.751 47.6,-18.751 48.599,-19.75 DD2.6
USB_P: DA1.1 DD2.7 | length 48.8
  Top Layer w0.3: DA1.1 20,-5 23,-8 44,-8 47,-11 47,-19 48.25,-20.25 DD2.7
VBUS: C3.2 DA1.5 XS1.1 Z1.1 | length 33.2
  Top Layer w0.2: Z1.1 Z1.1@14.22,-21.98
  Top Layer w0.3: XS1.1 12.26,-21.5 13,-20.76 ; v1(13,-19) 13,-20.76 ; C3.2 13.8,-25.2 14.22,-24.78 Z1.1 ; v1(14,-12) 15,-11 DA1.5 ; Z1.1@14.22,-21.98 13,-20.76
  Bottom Layer w0.3: v1(13,-19) 14,-20 17,-20 18,-19 18,-18 14,-14 v1(14,-12)
VCCD: C1.2 C8.2 C9.2 C10.2 C11.1 C12.2 DD1.6 DD2.12 DD2.24 DD2.39 DD2.46 DD3.3 R4.2 R6.2 R7.2 R9.1 Z2.2 Z3.2 | length 151.1
  Top Layer w0.2: Z3.2 Z3.2@51.7,-25.95 ; DD2.12 54.377,-22.75 54.502,-22.625 54.505,-22.625 55,-22.13 55,-19.117 55.117,-19 56.37,-19 57.62,-17.75 ; DD2.39 59.75,-17.75 ; v1(61,-27) 60.75,-26.75 DD2.24 60.75,-18.75 59.75,-17.75 ; R6.2 55.825,-9.175 55,-10 55,-13 56.25,-14.25 DD2.46 56.25,-16.377 56.375,-16.502 56.375,-16.505 57.62,-17.75 ; C9.2@64,-31.8 C9.2 ; DD1.6 67.95,-10.575 DD1.6@68.15,-10.375 ; R7.2 R7.2@72,-12.825 ; R4.2 R4.2@72.025,-7.8 ; C1.2@74.2,-11.1 C1.2 ; 57.62,-17.75 59.75,-17.75
  Top Layer w0.3: v1(21,-15) DD3.3 ; v1(47,-7) 48,-8 Z2.2 ; Z3.2@51.7,-25.95 53.775,-23.875 DD2.12 ; R6.2 v1(61,-6) ; C9.2@64,-31.8 v1(64,-30) 67,-30 ; C8.2 67,-30 ; DD1.6@68.15,-10.375 70.44,-10.375 71.065,-11 v1(72,-11) ; R9.1 69.825,-25.825 70.69,-26.69 C11.1 69,-29 68,-30 67,-30 ; R7.2@72,-12.825 v1(72,-11) ; R4.2 v1(72,-11) ; R4.2@72.025,-7.8 C10.2 ; C12.2 C1.2@74.2,-11.1 ; C1.2 v1(72,-11)
  Bottom Layer w0.3: v1(21,-15) 21,-12 26,-7 v1(47,-7) 48,-6 v1(61,-6) 68,-6 72,-10 v1(72,-11) ; v1(61,-27) v1(64,-30)
VPHY: C6.2 DD2.3 Z2.1 | length 12.4
  Top Layer w0.2: C6.2@50.7,-10.9 C6.2 50.8,-13.8 52,-15 52,-18 52.25,-18.25 DD2.3
  Top Layer w0.3: C6.2@50.7,-10.9 Z2.1
VPLL: C7.2 DD2.8 Z3.1 | length 8.7
  Top Layer w0.2: C7.2 51,-22 52.25,-20.75 DD2.8
  Top Layer w0.3: C7.2 49.8,-23.8 50.3,-24.3 Z3.1
VREG: C4.1 C5.2 DD2.40 Z1.2 | length 78.2
  Top Layer w0.2: Z1.2 15.78,-25.78 18,-28 27,-28 34,-21 v1(34,-18) ; v1(44,-18) 46.69,-20.69 C4.1 ; DD2.40 59.25,-15.173 59.375,-15.048 59.375,-15.045 60.215,-14.205 60.795,-14.205 v1(61,-14)
  Top Layer w0.3: v1(61,-14) C5.2
  Bottom Layer w0.2: v1(34,-18) v1(44,-18) 44,-13 45,-12 52,-12 54,-14 v1(61,-14)
pads on no net: DD2.18 DD2.19 DD2.20 DD2.30 DD2.31 DD2.32 DD2.33 DD3.4 XS1. XS1.5
copper on no net: | length 227.7
  Top Layer w0.254: 2,-36 2,-11 2,-2 3,-1 80,-1 81,-2 81,-36 80,-37 3,-37 2,-36

## Polygon pours and split planes (outlines as drawn)
GND on Top Layer (solid, pour order 48): 4,-36 3,-35 3,-3 4,-2 79,-2 80,-3 80,-35 79,-36
GND on Top Layer (solid, pour order 46): 15,-57
no net on Top Layer (solid, pour order 36): 4,-36
no net on Top Layer "Top Layer-No Net 2" (solid, pour order 8): 63,-6
no net on Top Layer "Top Layer-No Net" (solid, pour order 6): 77,-23
GND on Bottom Layer (solid, pour order 50): 4,-36 3,-35 3,-3 4,-2 79,-2 80,-3 80,-35 79,-36

## Other copper
Top Layer:
  text "Волков Михаил ИУ8 - 121" at 23,-5 h2